# Altium PCB PCB1_corrosao.PcbDoc (part 1 of 2)
Units mil, origin at the board's own origin, x right, y up, seen from the top; angles counter-clockwise.
Board outline 5775 x 3675 mil, 2 copper layers (Top Layer, Bottom Layer); 104 components, 55 nets, 279 pads, 10 vias.
Unrouted connection lines stored in the file: 28.
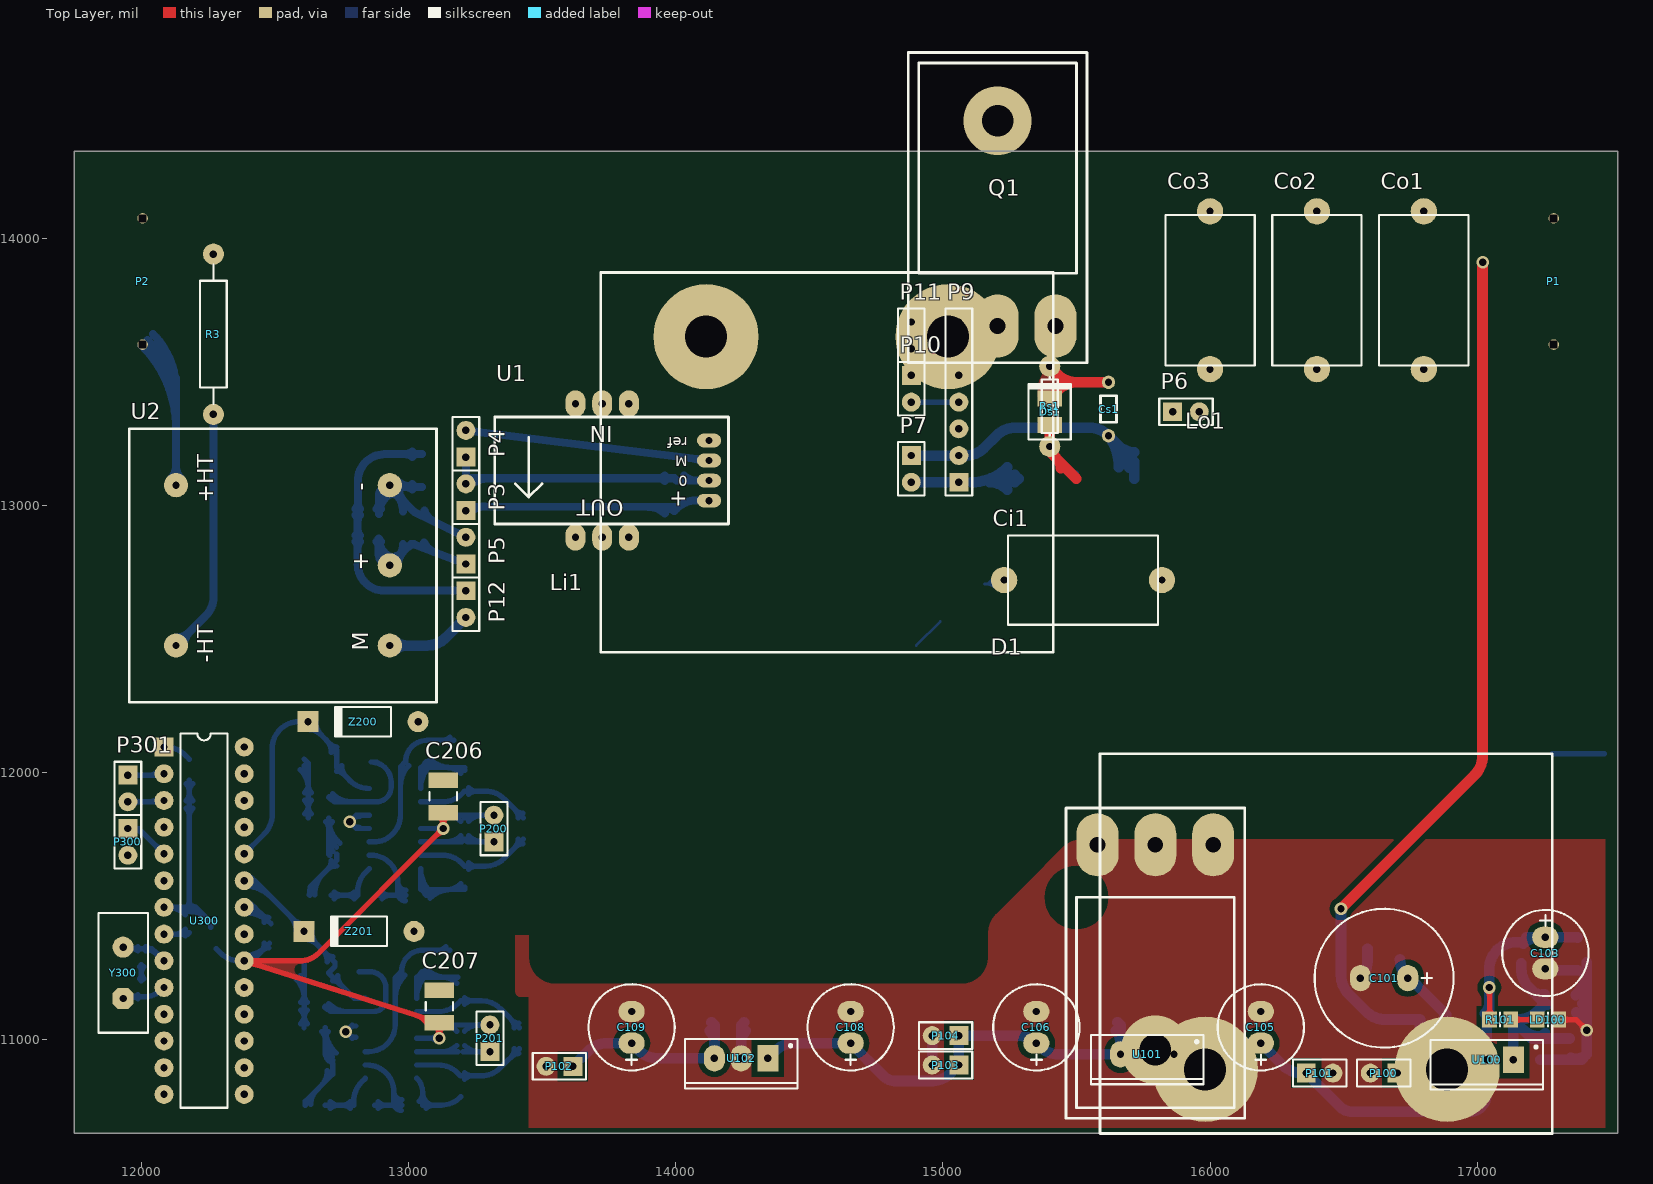
[diagram p0: Top Layer view]
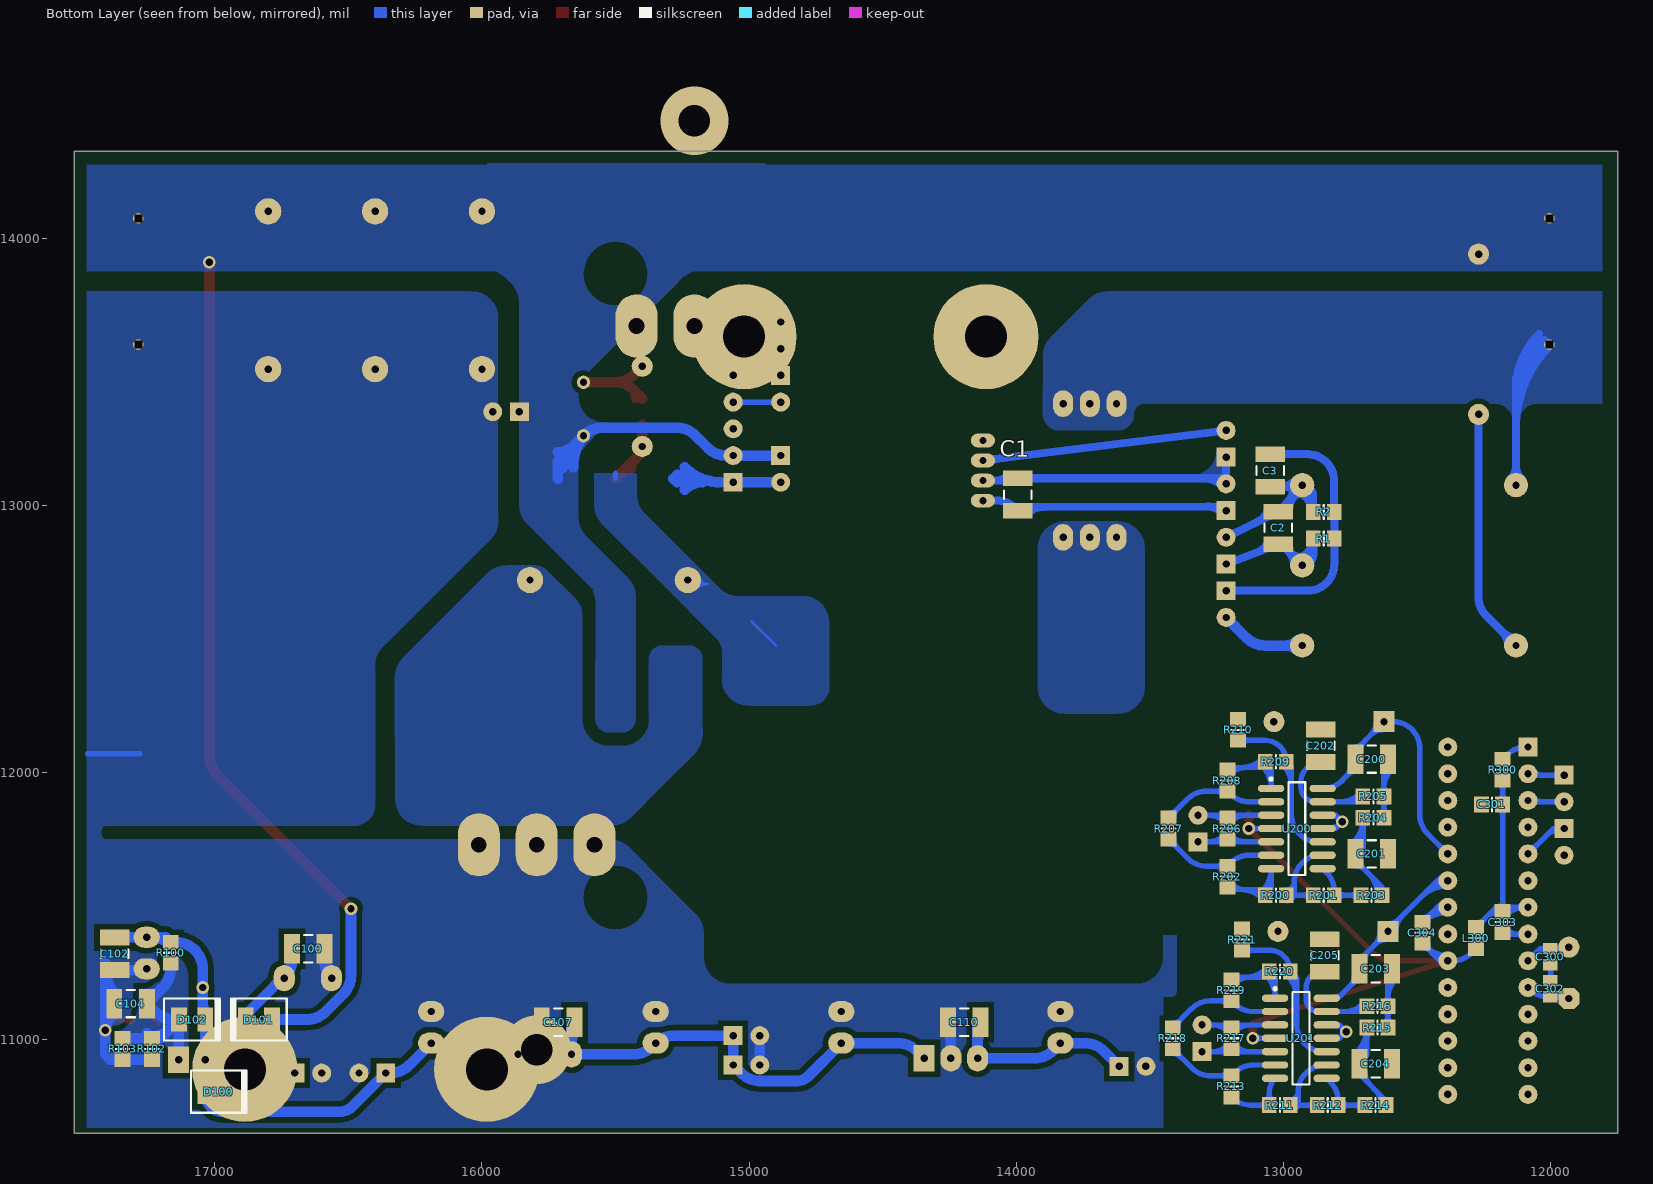
[diagram p1: Bottom Layer view, seen from below]

## Layer stack, top to bottom
Top Solder: solder mask 0.4, Solder Resist, Dk 3.5
Top Layer: signal copper 1.4
Dielectric1: dielectric 12.6, FR-4, Dk 4.8
Bottom Layer: signal copper 1.4
Bottom Solder: solder mask 0.4, Solder Resist, Dk 3.5

## Board outline
11750,14325 17525,14325 17525,10650 11750,10650

## Design rules (kind name [scope] priority, off if disabled: settings)
Clearance [All] p1: gap=20
PolygonConnect [All] p1: connectstyle=Direct reliefconductorwidth=10 reliefentries=4 polygonreliefangle="45 Angle" airgapwidth=10
RoutingVias [All] p1: holewidth=28 width=50 viastyle="Through Hole" minholewidth=28 minwidth=50 maxholewidth=28 maxwidth=50
SolderMaskExpansion [All] p1: expansion=4
Width [All] p1: maxlimit=100 minlimit=10 preferedwidth=20 minimp=50.000000 maximp=50.000000 favimp=50.000000
30 further rules are at their usual default settings.

## Classes and differential pairs
component class cuk: C1 C2 C3 Ci1 Co1 Co2 Co3 Cs1 D1 Ds1 Li1 Lo1 P1 P2 P3 P4 P5 P6 P7 P9 P10 P11 P12 Q1 R1 R2 R3 Rs1 U1 U2
component class Signals: C200 C201 C202 C203 C204 C205 C206 C207 P200 P201 R200 R201 R202 R203 R204 R205 R206 R207 R208 R209 R210 R211 R212 R213 R214 R215 R216 R217 R218 R219 R220 R221 U200 U201 Z200 Z201
component class uController: C300 C301 C302 C303 C304 L300 P300 P301 R300 U300 Y300
component class voltageSupplies: C100 C101 C102 C103 C104 C105 C106 C107 C108 C109 C110 D100 D101 D102 LD100 P100 P101 P102 P103 P104 R100 R101 R102 R103 U100 U101 U102

## Components (designator, comment, footprint, x,y, rotation, side; value= is the part's Value field where it differs from the comment)
C1 "Cer" C1210_M 13995,13040 r90 bottom
C2 "Cer" C1210_M 13020,12915 r270 bottom
C3 "Cer" C1210_M 13050,13130 r90 bottom
C100 "Cap" C1210_M 16650,11340 r0 bottom
C101 "Cap" CAPELTR-RAD6.6-DPP4.5 16562.83,11230 r0 top
C102 "Cap" C1210_M 17375,11321.06 r90 bottom
C103 "Cap" CAPELTR-RAD4.1-DPP3.0 17255,11265 r90 top
C104 "Cap" C1210_M 17315,11135 r180 bottom
C105 "Cap" CAPELTR-RAD4.1-DPP3.0 16190,11105 r270 top
C106 "Cap" CAPELTR-RAD4.1-DPP3.0 15350,11105 r270 top
C107 "Cap" C1210_M 15715,11065 r180 bottom
C108 "Cap" CAPELTR-RAD4.1-DPP3.0 14655,11105 r270 top
C109 "Cap" CAPELTR-RAD4.1-DPP3.0 13835,11105 r270 top
C110 "Cap" C1210_M 14195,11065 r180 bottom
C200 "Cer" C1210_M 12670,12050 r0 bottom
C201 "Cer" C1210_M 12670,11695 r0 bottom
C202 "Cer" C1210_M 12860,12100 r270 bottom
C203 "Cer" C1210_M 12655,11265 r0 bottom
C204 "Cer" C1210_M 12655,10910 r0 bottom
C205 "Cer" C1210_M 12845,11315 r270 bottom
C206 "Cer" C1210_M 13130,11910 r270 top
C207 "Cer" C1210_M 13116,11124 r270 top
C300 "Cap" C0805 12002,11310.47 r90 bottom
C301 "Cap" 6-0805_M 12220,11880 r0 bottom
C302 "Cap" C0805 12002,11190 r270 bottom
C303 "Cap" 6-0805_M 12180,11440 r270 bottom
C304 "Cap" 6-0805_M 12480,11400 r90 bottom
Ci1 "Cap" CAP4U7 15229.45,12720 r0 top
Co1 "Cap" CAP4U7 16800,14100 r270 top
Co2 "Cap" cap4u7 16400,14100 r270 top
Co3 "Cap" cap4u7 16000,14100 r270 top
Cs1 "Cap" 100NF 15620,13260 r90 top
D1 "60APU06" TO-247AC_HORIZONTAL 15795.28,10961.42 r180 top locked
D100 "BYD77" SOD87 16985,10805 r180 bottom
D101 "Diode 1N4002" SOD87 16835,11075 r0 bottom
D102 "1N4002" SOD87 17085,11075 r180 bottom
Ds1 "BYD77" SOD87 15400,13350 r90 top
L300 "Ferrite Bead" 6-0805_M 12280,11380 r90 bottom
LD100 "RED" 6-0805_M 17264.37,11075 r0 top
Li1 "Inductor" ? 13720,12450 r0 top locked
Lo1 "Inductor" ? 17281.1,12070 r180 top
P1 "Battery Connection" "POWER CONNECTION" 17286.1,13837.48 r270 top
P2 "Panel Connection" "POWER CONNECTION" 12005,13837.48 r90 top
P3 "+5V (Current Sensor)" HDR1X2 13215,12980 r90 top
P4 "Current Sensor Out" HDR1X2 13215,13180 r90 top
P5 "+24V or +-15V (Voltage Sensor)" HDR1X2 13215,12780 r90 top
P6 "Battery Connection" HDR1X2 15860,13350 r0 top
P7 "Mosfet Gate" HDR1X2 14882,13186 r270 top
P9 "Driver (INEP)" HDR1X7 15060,13086 r90 top
P10 "+12V (Driver)" HDR1X2 14882,13486 r270 top
P11 "PWM from uC (5v)" HDR1X2 14882,13586 r90 top
P12 "Voltage Sensor Out" HDR1X2 13215,12680 r270 top
P100 "Battery Connection" HDR1X2 16700,10875 r180 top
P101 "+24V (Voltage Sensor)" HDR1X2 16360,10875 r0 top
P102 "+5V (Current Sensor)" HDR1X2 13615,10900 r180 top
P103 "12V to Driver" HDR1X2 15060,10905 r180 top
P104 "12V to Fan" HDR1X2 15060,11015 r180 top
P200 "Current Sensor In" HDR1X2 13320,11740 r90 top
P201 "Voltage Sensor In" HDR1X2 13305,10955 r90 top
P300 "PWM from uC (5v)" HDR1X2 11950,11790 r270 top
P301 "Serial Port" HDR1X2 11950,11990 r270 top
Q1 "IRFP260" TO-247AC_HORIZONTAL 15204.72,14438.58 r0 top locked
R1 "1%" 6-0805_M 12849.37,12875 r180 bottom
R2 "1%" 6-0805_M 12849.37,12975 r0 bottom
R3 "1%" AXIAL-0.6 12270,13640 r90 top
R100 "Res1" 6-0805_M 17165,11325 r270 bottom
R101 "Res1" 6-0805_M 17085.63,11075 r180 top
R102 "Res1" 6-0805_M 17235,10965 r90 bottom
R103 "Res1" 6-0805_M 17345,10965 r90 bottom
R200 "1%" 6-0805_M 13028.74,11540 r0 bottom
R201 "1%" 6-0805_M 12849.37,11540 r0 bottom
R202 "1%" 6-0805_M 13210,11610 r270 bottom
R203 "1%" 6-0805_M 12670.63,11540 r0 bottom
R204 "1%" 6-0805_M 12663.62,11830 r0 bottom
R205 "1%" 6-0805_M 12663.62,11910 r180 bottom
R206 "1%" 6-0805_M 13210,11790 r270 bottom
R207 "1%" 6-0805_M 13430,11790 r270 bottom
R208 "1%" 6-0805_M 13210,11969.37 r270 bottom
R209 "1%" 6-0805_M 13028.74,12040 r0 bottom
R210 "1%" 6-0805_M 13170,12159.37 r270 bottom
R211 "1%" 6-0805_M 13013.74,10755 r0 bottom
R212 "1%" 6-0805_M 12834.37,10755 r0 bottom
R213 "1%" 6-0805_M 13195,10825 r270 bottom
R214 "1%" 6-0805_M 12655.63,10755 r0 bottom
R215 "1%" 6-0805_M 12648.62,11045 r0 bottom
R216 "1%" 6-0805_M 12648.62,11125 r180 bottom
R217 "1%" 6-0805_M 13195,11005 r270 bottom
R218 "1%" 6-0805_M 13415,11005 r270 bottom
R219 "1%" 6-0805_M 13195,11184.37 r270 bottom
R220 "1%" 6-0805_M 13013.74,11255 r0 bottom
R221 "1%" 6-0805_M 13155,11374.37 r270 bottom
R300 "Res1" 6-0805_M 12180,12010 r270 bottom
Rs1 "1%" AXIAL-0.3 15400,13370 r270 top
U1 "LTSP 25-NP" "LTSP 25-NP" 13825,13380 r180 top
U2 "LV20-P" LV20-P 12130,12475 r90 top locked
U100 "TL783" TO-220AB 17035,10925 r180 top
U101 "LM7812" TO-220AB 15765,10945 r180 top
U102 "LM7805" TO-220AB 14245,10930 r180 top
U200 "LP324M" M14A_M 12950,11790 r180 bottom
U201 "LP324M" M14A_M 12935,11005 r180 bottom
U300 "ATmega328p" 28P3 12235,11445 r270 top
Y300 "16MHz" HC-49U 11932,11250 r90 top
Z200 "5V1" DO-41 12830,12190 r180 top
Z201 "5V1" DO-41 12815,11405 r180 top

## Footprints (in the part's own frame and the unit in brackets; to place one, negate y for a bottom-side part, rotate by r counter-clockwise, add the part's x,y. Pads: shape width x height; smd on the part's side, far side on the other; paste and mask are expansions set on the pad)
6-0805_M [mm] "Chip Resistor, Body 2.0x1.2mm, IPC Low Density"
  rect 1.4x1.5 smd: 1(-1,0) 2(1,0)
  silkscreen extent 0,-0.65 0,0.65, body extent -1.07,-0.7 1.07,0.7, height 0.7
28P3 [mm] "DIP; 28 Leads; Row Spacing 7.62 mm; Pitch 2.54 mm"
  rect 1.8x1.8 hole 0.7: 1(-16.51,-3.81)
  round 1.8 hole 0.7: 2(-13.97,-3.81) 3(-11.43,-3.81) 4(-8.89,-3.81) 5(-6.35,-3.81) 6(-3.81,-3.81) 7(-1.27,-3.81) 8(1.27,-3.81) 9(3.81,-3.81) 10(6.35,-3.81) 11(8.89,-3.81) 12(11.43,-3.81) 13(13.97,-3.81) 14(16.51,-3.81) 15(16.51,3.81) 16(13.97,3.81) 17(11.43,3.81) 18(8.89,3.81) 19(6.35,3.81) 20(3.81,3.81) 21(1.27,3.81) 22(-1.27,3.81) 23(-3.81,3.81) 24(-6.35,3.81) 25(-8.89,3.81) 26(-11.43,3.81) 27(-13.97,3.81) 28(-16.51,3.81)
  silkscreen extent -17.78,-2.23 17.78,2.23
100NF [mm]
  round 1.27 hole 0.7: 1(0,0) 2(5.08,0)
  silkscreen extent 1.27,-0.76 3.81,0.76
AXIAL-0.3 [mm] "Axial Device, Thru-Hole; 2 Leads; 0.3 in Pin Spacing"
  round 2 hole 0.7: 1(-3.81,0) 2(3.81,0)
  silkscreen extent -2.77,-0.76 2.77,0.76
AXIAL-0.6 [mm] "Axial Device, Thru-Hole; 2 Leads; 0.6 in Pin Spacing"
  round 2 hole 0.7: 1(-7.62,0) 2(7.62,0)
  silkscreen extent -6.6,-1.27 6.6,1.27
C0805 [mm] "Chip Capacitor, Body 2.0x1.3mm, IPC High Density"
  rect 1.1x1.4 smd: 1(-0.75,0) 2(0.75,0)
  body extent -1.1,-0.72 1.1,0.72, height 1.4
C1210_M [mm] "Chip Capacitor, Body 3.2x2.5mm, IPC Low Density"
  rect 1.5x2.8 smd: 1(-1.55,0) 2(1.55,0)
  silkscreen extent -0.4,-1.3 0.4,1.3, body extent -1.7,-1.35 1.7,1.35, height 1.5
CAP4U7 [mm]
  round 2.5 hole 0.7: 1(0,0) 2(15,0)
  silkscreen extent 0.35,-4.25 14.64,4.25
cap4u7 [mm]
  round 2.5 hole 0.7: 1(0,0) 2(15,0)
  silkscreen extent 0.35,-4.25 14.64,4.25
CAPELTR-RAD4.1-DPP3.0 [mm] "Capacitor Eletrolitico Radial 4.1mm com 3.0mm entre pinos"
  oval 2x2.5 hole 0.7: 1(0,0) 2(3,0)
  silkscreen extent -2.6,-4.1 5.6,4.1
CAPELTR-RAD6.6-DPP4.5 [mm] "Capacitor Eletrolitico Radial 6.6mm com 4.5mm entre pinos"
  oval 2x2.5 hole 0.7: 1(0,0) 2(4.5,0)
  silkscreen extent -4.35,-6.6 8.85,6.6
DO-41 [mm] "Diode, Axial; Body 5.2 x 2.7 mm (LxDia. max), Lead Dia. 0.86 mm (max)"
  round 2 hole 0.7: 1(-5.23,0)
  rect 2x2 hole 0.7: 2(5.23,0)
  silkscreen extent -2.65,-1.41 2.75,1.4
HC-49U [mm] "Quartz Crystal, Thru-Hole; 2 Leads; Body 11.35 x 4.65 x 13.46 mm (LxWxH max)"
  oct 2x2 hole 0.7: 1(-2.44,0)
  round 2 hole 0.7: 2(2.44,0)
  silkscreen extent -5.7,-2.35 5.7,2.35
HDR1X2 [mm] "Connector; Header; 2 Position"
  rect 1.8x1.8 hole 0.7: 1(0,0)
  round 1.8 hole 0.7: 2(2.54,0)
  silkscreen extent -1.27,-1.27 3.81,1.27
HDR1X7 [mm] "Connector; Header; 7 Position"
  rect 1.8x1.8 hole 0.7: 1(0,0)
  round 1.8 hole 0.7: 2(2.54,0) 3(5.08,0) 4(7.62,0) 5(10.16,0) 6(12.7,0) 7(15.24,0)
  silkscreen extent -1.27,-1.27 16.51,1.27
"LTSP 25-NP" [mm] "Current Transducer (25 A)"
  oval 1.9x2.54 hole 0.7 unplated: 1(0,0) 2(2.54,0) 3(5.08,0) 4(5.08,12.7) 5(2.54,12.7) 6(0,12.7)
  oval 2.3x1.3 hole 0.7 unplated: 7(-7.62,9.21) 8(-7.62,7.305) 9(-7.62,5.4) 10(-7.62,3.495)
  silkscreen extent -9.46,1.27 12.74,11.43
LV20-P [mm] "Voltage Transducer LV 20-P"
  round 2.3 hole 0.7 unplated: 1(0,-20.32) 2(7.62,-20.32) 3(15.24,-20.32) 4(0,0) 5(15.24,0)
  silkscreen extent -5.38,-24.76 20.62,4.44
M14A_M [mm] "SOIC, 14-Leads, Body 8.6x3.9mm, Pitch 1.27mm, IPC Low Density"
  oval 2.5x0.7 smd: 1(-2.45,3.81) 2(-2.45,2.54) 3(-2.45,1.27) 4(-2.45,0) 5(-2.45,-1.27) 6(-2.45,-2.54) 7(-2.45,-3.81) 8(2.45,-3.81) 9(2.45,-2.54) 10(2.45,-1.27) 11(2.45,0) 12(2.45,1.27) 13(2.45,2.54) 14(2.45,3.81)
  silkscreen extent -2.58,-4.4 0.8,4.83, body extent -2,-4.38 2,4.38, height 1.75
"POWER CONNECTION" [mm]
  round 1 hole 0.7 square: 1(-6,0) 2(6,0)
SOD87 [mm]
  rect 1.5x2.3 smd: A(-1.253,0) K(1.253,0)
  silkscreen extent -2.65,-2.01 2.65,2.01
TO-220AB [mm] "TO, Thru-Hole, Vertical, Heatsink Mounted; 3 In-Line Leads; Pitch 2.54 mm"
  rect 2x2.5 hole 0.7: 1(-2.54,0)
  oval 2x2.5 hole 0.7: 2(0,0) 3(2.54,0)
  silkscreen extent -5.35,-1.85 5.35,2.85, body extent -5.4,-1.9 5.4,2.9, height 19.3
TO-247AC_HORIZONTAL [mm]
  oval 4x6 hole 1.5: 1(-5.5,-19.5) 2(0,-19.5) 3(5.5,-19.5)
  silkscreen extent -8.5,-23 8.5,6.5, body extent -7.75,-19.8 7.75,5.6, height 5
? [mm]
  round 10 hole 4: 1(10,30) 2(33,30)
  silkscreen extent 0,0 43,36.1

## Part data
C1 C2 C3 C200 C201 C202 C203 C204 C205 C206 C207: library part Cap, "Capacitor"
C100 C101 C102 C103 C104 C105 C106 C107 C108 C109 C110 C301 C303 C304 Ci1 Co1 Co2 Co3 Cs1: "Capacitor"
C300 C302: library part "Cap Semi", "Capacitor (Semiconductor SIM Model)"
D100 D102 Ds1: library part "Diode 1N4002", "1 Amp General Purpose Rectifier"
D101: "1 Amp General Purpose Rectifier"
L300: library part Inductor, "Inductor"
LD100: library part LED, "Diodo Emissor de Luz"
P1 P2 P3 P4 P5 P6 P7 P10 P11 P12 P100 P101 P102 P103 P104 P200 P201 P300 P301: library part "Header 2", "Header, 2-Pin"
P9: library part "Header 7", "Header, 7-Pin"
Q1: "HEXFET Power MOSFET"
R1 R2 R3 R200 R201 R202 R203 R204 R205 R206 R207 R208 R209 R210 R211 R212 R213 R214 R215 R216 R217 R218 R219 R220 R221 Rs1: library part Res1, "Resistor"
R100 R101 R102 R103 R300: "Resistor"
U1: "Current Transducer LTSP (25 A)"
U2: "Voltage Transducer (500 V)"
U100: library part L7805ACV, "Precision 1A Regulator"
U101 U102: library part µA7805CKC, "Positive-Voltage Regulator"
U200 U201: "Micropower Quad Operational Amplifier"
U300: library part ATmega8-16PI, "8-Bit AVR Microcontroller with 8K Bytes of In-System Programmable Flash Memory"
Y300: library part ECS-10-13-1, "Crystal Oscillator"
Z200 Z201: library part "D Zener", "Zener Diode"

## Via types
v1: diameter 47.24, hole 27.56, Top Layer to Bottom Layer, 8 vias
v2: diameter 255.91, hole 118.11, Top Layer to Bottom Layer, 2 vias

## Nets (pads, with @x,y where several pads share a name; then routed paths per layer and width w, separated by ;. In a path a pad name is that pad's centre, name@x,y a point inside that pad or via, vN(x,y) a via of type N, cw(c..) or ccw(c..) an arc to the next point about the centre after c; other vN are vias at no path point)
+5V: C109.2 C110.2 C301.1 C303.1 L300.2 P102.1 R300.2 U102.3 U300.7 | length 2218.1
  Bottom Layer w20: U300.7@12085,11495 12204.37,11495 L300.2@12255.59,11443.78 ; U300.7@12097.91,11495 cw(c12097.91,11399.25) C303.1@12165.62,11466.95 ; U300.7@12098.81,11481.19 cw(c12132.14,11447.86) 12132.14,11495 cw(c12132.14,11542.14) U300.7@12098.81,11508.81 ; 12146.19,11495 cw(c12146.19,11447.53) C303.1@12179.76,11481.1 ; C303.1@12167.58,11491.79 ccw(c12137.61,11521.76) 12180,11521.76 ccw(c12222.39,11521.76) C303.1@12192.42,11491.79 ; R300.2@12167.58,11958.21 cw(c12137.61,11928.24) 12180,11928.24 cw(c12222.39,11928.24) R300.2@12192.42,11958.21 ; C301.1@12168.21,11865.62 cw(c12139.76,11837.16) 12180,11837.16 ; C301.1@12168.21,11894.38 ccw(c12139.76,11922.84) 12180,11922.84 ; 12180,11834.12 cw(c12224.54,11834.12) C301.1@12193.05,11865.62 ; 12180,11925.88 ccw(c12224.54,11925.88) C301.1@12193.05,11894.38 ; R300.2@12180,11970.63 12180,11560.63 C303.1@12180,11479.37 ; C303.1@12181.48,11501.81 cw(c12182.28,11464.94) C303.1@12208.36,11491.01 ; C303.1@12181.92,11481.81 cw(c12183.69,11400.1) 12241.48,11457.89 ; 12246.66,11452.71 cw(c12213.33,11419.37) L300.2@12260.47,11419.37 ; 12251.42,11447.95 ccw(c12278.03,11474.57) L300.2@12278.03,11436.93 ; C303.1@12180,11479.37 cw(c12180,11382.8) 12248.28,11451.09 ccw(c12180,11382.8) C303.1@12180,11479.37
  Bottom Layer w40: P102.1@13615,10900 13672.6,10957.6 cw(c13743.31,10886.89) 13743.31,10986.89 C109.2@13835,10986.89 13862.6,10959.29 ccw(c13933.31,11030) 13933.31,10930 U102.3@14145,10930 14145,11053.98 C110.2@14133.98,11065 ; C110.2@14127.24,11032.67 cw(c14084.36,10989.79) 14145,10989.79
+5V_ADC: C206.2 C207.2 C304.1 L300.1 U200.4 U201.4 U300.20 | length 3178.7
  Top Layer w20: U300.20@12393.98,11277.66 cw(c12415.67,11235.8) 12429.93,11280.74 cw(c12444.2,11325.67) U300.20@12402.34,11303.98 ; U300.20@12398.81,11281.19 cw(c12432.14,11247.86) 12432.14,11295 cw(c12432.14,11342.14) U300.20@12398.81,11308.81 ; 13030,11090.27 cw(c13007.74,11020.14) C207.2@13073.07,11053.99 ; C207.2@13101.96,11049.41 cw(c13068.05,11016.65) 13115.19,11015.84 cw(c13162.32,11015.03) C207.2@13129.57,11048.93 ; v1@13105.54,11014.8 ccw(c13082.69,11038.45) 13115.57,11037.88 ccw(c13148.45,11037.31) v1@13124.8,11014.46 ; v1(13115,11005) C207.2@13116,11062.98 13029.6,11090.4 U300.20@12385,11295 12593.58,11295 ccw(c12593.58,11395) 12664.29,11324.29 v1(13130,11790) C206.2@13130,11848.98 ; C206.2@13116.19,11835.17 cw(c13082.86,11801.83) 13130,11801.83 cw(c13177.14,11801.83) C206.2@13143.81,11835.17 ; v1@13116.38,11790 cw(c13083.49,11790) 13106.75,11766.75 cw(c13130,11743.49) v1@13130,11776.38 ; v1@13120.37,11799.63 ccw(c13097.11,11822.89) 13130,11822.89 ccw(c13162.89,11822.89) v1@13139.63,11799.63
  Bottom Layer w20: L300.1@12280,11340.63 12296.34,11324.29 ccw(c12367.05,11395) 12367.05,11295 U300.20@12385,11295 ; U300.20@12385,11294.53 ccw(c12385,11364.29) 12434.33,11314.96 ; U300.20@12385,11297.44 U300.20@12385,11295 ; U300.20@12385,11314.53 ccw(c12385,11432.58) C304.1@12468.47,11349.1 ; 12446.66,11327.29 ccw(c12413.33,11360.63) C304.1@12460.47,11360.63 ; 12451.42,11332.05 cw(c12478.03,11305.43) C304.1@12478.03,11343.07 ; C304.1@12480,11360.63 12414.37,11295 U300.20@12385,11295 ; U201.4@13031.46,11005 v1(13115,11005) ; U200.4@13046.46,11790 v1(13130,11790) ; v1@13105.37,10995.37 ccw(c13082.11,10972.11) 13082.11,11005 ccw(c13082.11,11037.89) v1@13105.37,11014.63 ; v1@13120.37,11780.37 ccw(c13097.11,11757.11) 13097.11,11790 ccw(c13097.11,11822.89) v1@13120.37,11799.63 ; U300.20@12385,11295 ccw(c12385,11365.91) 12435.14,11315.77 cw(c12385,11365.91) U300.20@12385,11295
+12V: C106.2 C107.2 C108.2 P103.1 P104.1 U101.3 U102.1 | length 1793.9
  Bottom Layer w40: U102.1@14345,10930 14372.6,10957.6 cw(c14443.31,10886.89) 14443.31,10986.89 C108.2@14655,10986.89 14779.74,10862.15 ccw(c14820,10902.41) 14820,10845.47 14962.99,10845.47 ccw(c14962.99,10845.77) 14963.2,10845.56 ccw(c14959.05,10945.47) 14989.36,10850.18 ccw(c14959.05,10945.47) 15029.76,10874.76 P103.1@15060,10905 P104.1@15060,11015 15282.14,11015 ; C107.2@15647.24,11032.67 cw(c15604.36,10989.79) U101.3@15665,10989.79 ; C107.2@15653.98,11065 15665,11053.98 U101.3@15665,10945 15433.31,10945 cw(c15433.31,11045) 15362.6,10974.29 C106.2@15350,10986.89 ; 15282.14,11015 cw(c15282.14,10919.03) C106.2@15350,10986.89 ; 15282.14,11015 cw(c15282.14,10919.03) C106.2@15350,10986.89
+24V: C102.2 C103.2 C105.2 D100.A D102.K P101.1 R100.1 R101.2 U100.2 U101.1 | length 2506.3
  Top Layer w20: R101.2@17033.84,11089.38 ccw(c17003.87,11119.36) 17046.26,11119.36 ccw(c17088.65,11119.36) R101.2@17058.68,11089.38 ; v1@17035.37,11185.37 cw(c17009.07,11159.07) 17046.26,11159.07 ; v1(17045,11195) 17046.26,11193.74 R101.2@17046.26,11075 ; 17046.26,11165.16 cw(c17074.85,11165.16) v1@17054.63,11185.37
  Bottom Layer w40: U101.1@15865,10945 15877.6,10957.6 cw(c15948.31,10886.89) 15948.31,10986.89 C105.2@16190,10986.89 16272.6,10904.29 ccw(c16343.31,10975) 16343.31,10875 P101.1@16360,10875 16484.26,10750.74 ccw(c16535,10801.49) 16535,10729.72 16970,10729.72 ccw(c16970,10794.06) 17034.34,10794.06 D100.A@17034.34,10805 ; D102.K@17028.92,11097.49 ccw(c16990.11,11136.29) 17045,11136.29 ; D100.A@17035.66,10806.32 D102.K@17035.66,11075 17045,11084.34 v1(17045,11195) 17045,11264.37 cw(c17145,11264.37) 17067.21,11327.21 cw(c17145,11264.37) 17082.16,11342.16 cw(c17145,11264.37) 17145,11364.37 R100.1@17165,11364.37 ; R100.1@17172.31,11359.03 cw(c17230.46,11300.88) C103.2@17230.46,11383.11 ; R100.1@17183.74,11383.11 C103.2@17255,11383.11 17373.98,11383.11 C102.2@17375,11382.09
+VPANEL: P2.1 U1.1 U1.2 U1.3 U2.5 | length 1377.6
  Bottom Layer w30: P2.1@12001.69,13597.95 cw(c11691.91,13288.17) 12130,13288.17 ; 12022.9,13619.16 cw(c11764.34,13360.6) 12130,13360.6 ; 12044.11,13640.37 cw(c11836.77,13433.03) 12130,13433.03 ; U2.5@12108.59,13096.41 ccw(c12056.91,13148.09) 12130,13148.09 ccw(c12203.09,13148.09) U2.5@12151.41,13096.41 ; U2.5@12130,13075 12130,13476.26
-VBAT: C1.2 C100.1 C101.1 C102.1 C103.1 C104.1 C105.1 C106.1 C107.1 C108.1 C109.1 C110.1 C201.1 C202.1 C204.1 C205.1 C206.1 C207.1 C300.1 C301.2 C302.1 C303.2 C304.2 Co1.2 Co2.2 Co3.2 LD100.2 Lo1.1 P1.2 P3.2 P4.1 P6.2 P9.4 P9.7 P10.2 P11.2 P100.2 P101.2 P102.2 P103.2 P104.2 P300.2 R102.1 R103.1 R210.1 R221.1 U1.8 U101.2 U102.2 U200.11 U200.12 U201.11 U201.12 U300.8 U300.22 Z200.1 Z201.1 | length 5446
  Top Layer w20: LD100.2@17303.74,11075 17370,11075 v1(17410,11035) ; LD100.2@17316.16,11062.58 cw(c17346.13,11032.61) 17346.13,11075 cw(c17346.13,11117.39) LD100.2@17316.16,11087.42 ; v1@17396.38,11035 ccw(c17363.49,11035) 17386.75,11058.25 ccw(c17410,11081.51) v1@17410,11048.62
  Bottom Layer w20: C302.1@11993.76,11227.77 ccw(c11978.69,11242.83) 12000,11242.83 ; C300.1@11993.76,11272.7 cw(c11978.69,11257.64) 12000,11257.64 ; C302.1@12000,11219.53 C300.1@12000,11280.94 ; 12000,11247.98 cw(c12034.96,11247.98) C300.1@12010.24,11272.7 ; 12000,11252.49 ccw(c12034.96,11252.49) C302.1@12010.24,11227.77 ; U300.8@12085,11395 12174.37,11395 C303.2@12180,11400.63 ; U300.8@12098.81,11381.19 cw(c12132.14,11347.86) 12132.14,11395 cw(c12132.14,11442.14) U300.8@12098.81,11408.81 ; 12122.05,11395 ccw(c12122.05,11456.61) C303.2@12165.62,11413.05 ; 12149.23,11395 cw(c12149.23,11371.83) C303.2@12165.62,11388.21 ; U300.22@12384.72,11495.38 cw(c12404.05,11468.56) 12427.43,11491.94 ; U300.22@12385,11475.47 cw(c12385,11333.28) C304.2@12485.54,11433.83 ; U300.22@12385,11495.47 cw(c12385,11401.57) 12451.4,11467.97 ccw(c12478.03,11494.57) C304.2@12478.03,11456.93 ; U300.22@12385,11515.47 cw(c12385,11469.85) U300.22@12417.26,11502.11 ; U300.22@12396.42,11479.16 cw(c12417.98,11449.24) 12444.05,11475.32 ; U300.22@12400.55,11483.18 cw(c12424.37,11465.08) 12424.37,11495 ; U300.22@12400.55,11506.82 ccw(c12424.37,11524.92) 12424.37,11495 ; 12446.66,11472.71 cw(c12413.33,11439.37) C304.2@12460.47,11439.37 ; C304.2@12480,11439.37 12452.21,11467.16 ; v1@12774.28,11020.72 ccw(c12803.11,11049.55) U201.11@12803.11,11008.78 ; v1@12774.28,11039.28 cw(c12803.11,11010.45) U201.12@12803.11,11051.22 ; v1@12789.28,11805.72 ccw(c12818.11,11834.55) U200.11@12818.11,11793.78 ; v1@12789.28,11824.28 cw(c12818.11,11795.45) U200.12@12818.11,11836.22 ; U201.11@12790,11005 v1(12765,11030) U201.12@12790,11055 ; U200.11@12853.54,11790 12805,11790 v1(12780,11815) 12805,11840 U200.12@12853.54,11840 ; P10.2@14882,13386 P9.4@15060,13386 ; P11.2@14882,13686 P9.7@15060,13686 ; P10.2@14895.81,13372.19 cw(c14929.14,13338.86) 14929.14,13386 cw(c14929.14,13433.14) P10.2@14895.81,13399.81 ; P11.2@14895.81,13672.19 cw(c14929.14,13638.86) 14929.14,13686 cw(c14929.14,13733.14) P11.2@14895.81,13699.81 ; P9.4@15046.19,13372.19 ccw(c15012.86,13338.86) 15012.86,13386 ccw(c15012.86,13433.14) P9.4@15046.19,13399.81 ; P9.7@15046.19,13672.19 ccw(c15012.86,13638.86) 15012.86,13686 ccw(c15012.86,13733.14) P9.7@15046.19,13699.81 ; 17281.1,12070 17475,12070 ; 12424.37,11495 U300.22@12385,11495 cw(c12385,11399.95) 12452.21,11467.16 ; 12424.37,11495 12452.21,11467.16
  Bottom Layer w30: P3.2@13204.73,13090.27 ccw(c13179.93,13115.07) 13215,13115.07 ccw(c13250.07,13115.07) P3.2@13225.27,13090.27 ; P4.1@13204.73,13169.73 cw(c13179.93,13144.93) 13215,13144.93 cw(c13250.07,13144.93) P4.1@13225.27,13169.73 ; P4.1@13215,13180 P3.2@13215,13080 13236.02,13101.02 C1.2@13995,13101.02 14003.62,13092.4 U1.8@14125,13092.4 ; P3.2@13225.27,13069.73 cw(c13300.83,12994.17) 13300.83,13101.02 ; C1.2@13959.14,13090.75 ccw(c13934.34,13065.95) 13934.34,13101.02 ccw(c13934.34,13136.1) C1.2@13959.14,13111.3 ; C1.2@14030.86,13111.3 ccw(c14076.48,13156.91) 14076.48,13092.4
  Bottom Layer w40: U102.2@14245,10930 14245,11053.98 C110.1@14256.02,11065 ; 14245,10989.79 cw(c14305.64,10989.79) C110.1@14262.76,11032.67 ; P103.2@14960,10905 P104.2@14960,11015 ; U101.2@15765,10945 15765,11053.98 C107.1@15776.02,11065 ; U101.2@15765,10989.79 cw(c15825.64,10989.79) C107.1@15782.76,11032.67 ; C101.1@16562.83,11230 ccw(c16499.72,11293.11) 16588.98,11293.11 C100.1@16588.98,11340 ; R102.1@17235.63,10925 17345.63,10925 R103.1@17345,10925.63 17390.63,10925.63 17410,10945 ; C103.1@17255,11265 17259.96,11260.04 C102.1@17375,11260.04 ; C103.1@17263.13,11273.13 ccw(c17294.73,11304.73) C103.1@17294.73,11260.04 ; R103.1@17349.78,10932.65 ccw(c17370.53,10984.47) 17410,10945 ; C104.1@17369.29,11167.33 ccw(c17271,11265.62) C102.1@17410,11265.62 ; C104.1@17370.7,11101.51 cw(c17320.88,11027.61) v1@17410,11027.61 ; C104.1@17393.06,11134.68 cw(c17371.58,11102.82) 17410,11102.82 ; C102.1@17393.85,11253.3 cw(c17354.87,11214.32) 17410,11214.32 ; C104.1@17397.57,11139.04 ccw(c17367.56,11169.05) 17410,11169.05 ; 17410,11290.01 v1(17410,11035) 17410,10945
-VPANEL: Co1.1 Co2.1 Co3.1 Cs1.1 D1.2 D101.A P1.1 P2.2 P6.1 P7.1 P9.2 P100.1 Q1.3 R3.2 | length 4761.3
  Top Layer w40: v1(16490,11490) 16990.71,11990.71 ccw(c16920,12061.42) 17011.83,12021.83 ccw(c16920,12061.42) 17020,12061.42 v1(17020,13910)
  Bottom Layer w39.37: P7.1@14882,13186 P9.2@15060,13186 15084.99,13186 ccw(c15084.99,13285.01) 15155,13215 15200.71,13260.71 cw(c15271.42,13190) 15271.42,13290 15548.58,13290 cw(c15548.58,13190) 15619.29,13260.71 Cs1.1@15620,13260 15716.54,13163.46 15716.54,13100 ; Cs1.1@15607.96,13272.04 cw(c15487.61,13151.69) 15657.57,13142.54 ; 15656.85,13223.15 ccw(c15716.54,13282.83) 15716.54,13198.43 ; 15670.37,13209.63 cw(c15606.05,13145.31) 15696.88,13140.43
  Bottom Layer w40: v1(16490,11490) 16490,11241.42 ccw(c16590,11241.42) 16519.29,11170.71 16585.71,11104.29 ccw(c16656.42,11175) 16656.42,11075 D101.A@16785.66,11075 16785.66,11002.08 cw(c16685.66,11002.08) 16756.37,10931.37 P100.1@16700,10875
DRAIN: Ci1.1 Ds1.A Li1.2 Q1.2 Rs1.2 | length 692
  Top Layer w20: Rs1.2@15400,13200 Rs1.2@15400,13220
  Top Layer w39.37: Rs1.2@15400,13200 15500,13100 ; Rs1.2@15400,13220 Ds1.A@15400,13300.66 ; Rs1.2@15407.87,13220 ccw(c15475.17,13220) 15427.58,13172.42 ; 15427.03,13172.97 cw(c15393.42,13139.37) 15440.94,13139.37
  Bottom Layer w10: 14900,12475 14990.55,12565.55 ; 15158.92,12705 cw(c15158.92,12649.47) Ci1.1@15198.19,12688.74 ; 15168.49,12705 ccw(c15168.49,12733.15) Ci1.1@15196,12727.21 ; 15180.88,12705 ccw(c15180.88,12730.47) Ci1.1@15205.78,12725.1 ; Ci1.1@15186.23,12729.32 cw(c15156.1,12735.82) 15156.1,12705 Ci1.1@15209.45,12705
  Bottom Layer w20: 15500,13100 15500,13120
GATE: P7.2 P9.1 Q1.1 | length 1317.7
  Bottom Layer w20: P9.1@15060,13086 15269.46,13086 ; P9.1@15073.81,13072.19 cw(c15107.14,13038.86) 15107.14,13086 cw(c15107.14,13133.14) P9.1@15073.81,13099.81 ; P9.1@15083.71,13086 ccw(c15083.71,13299.75) 15234.86,13148.61 ; 15132,13086 ccw(c15132,13251.47) 15249,13134.46 ; 15151.31,13086 cw(c15151.31,12967.85) 15234.86,13051.39 ; 15180.28,13086 ccw(c15180.28,13203.18) 15263.14,13120.32 ; 15199.59,13086 cw(c15199.59,13016.13) 15249,13065.54
  Bottom Layer w39.37: P7.2@14882,13086 P9.1@15060,13086 ; 15107.09,13086 ccw(c15107.09,13276.37) 15241.71,13141.76 ; 15174.69,13086 cw(c15174.69,12991.23) 15241.71,13058.24 ; 15202.14,13086 ccw(c15202.14,13181.32) 15269.55,13113.92 ; 15269.46,13086 15283.46,13100
NetC2_1: C2.1 C3.1 P5.2 R2.2 U2.3 | length 1678.9
  Bottom Layer w30: U2.3@12930,13044.72 cw(c12930,12993.3) 12966.36,13029.66 ; U2.3@12940.63,13064.37 U2.3@12936.02,13068.98 ; U2.3@12951.41,13053.59 cw(c12988.55,13016.45) 12988.55,13068.98 ; U2.3@12951.41,13096.41 ccw(c13017.63,13162.63) C3.1@13017.63,13068.98 ; U2.3@12951.51,13044.51 cw(c12883.03,12976.02) C2.1@12979.88,12976.02 ; U2.3@12960.28,13075 ccw(c13055.04,13075) 12988.03,13007.99 ; C3.1@13014.14,13058.7 ccw(c12989.34,13033.9) 12989.34,13068.98 ccw(c12989.34,13104.05) C3.1@13014.14,13079.25 ; C3.1@13050,13068.98 U2.3@12936.02,13068.98 ; C2.1@13059.34,12980.7 ccw(c13129.09,13004.42) 13096.55,12938.33 ; P5.2@13201.25,12875.32 ccw(c13168.04,12864.03) 13183.54,12895.49 ccw(c13199.03,12926.96) P5.2@13210.32,12893.75 ; P5.2@13230,12885 13209.99,12885 cw(c13140.07,12813.5) 13210.79,12884.21 P5.2@13215,12880 13147.53,12913.23 C2.1@13020,12976.02 12930,13066.02 U2.3@12930,13075 ; 12889.37,13034.37 cw(c12930,13034.37) U2.3@12930,13075 ; 12889.37,13034.37 12889.37,12975 12889.37,13034.37 ; 12889.37,13034.37 U2.3@12930,13075 ; U2.3@12930,13075 U2.3@12936.02,13068.98 ; R2.2@12879.86,12985.85 ccw(c12856.9,13008.81) 12889.37,13008.81 cw(c12856.9,13008.81) R2.2@12879.86,12985.85 ; R2.2@12889.37,12967.06 cw(c12976.7,12967.06) 12942.02,13047.21 ccw(c12976.7,12967.06) R2.2@12889.37,12967.06 ; 12889.37,13005.77 ccw(c12917.54,13005.77) 12897.62,12985.85 cw(c12917.54,13005.77) 12889.37,13005.77 ; 12889.37,13012.73 cw(c12956.94,13012.73) 12930.11,13074.75 ccw(c12956.94,13012.73) 12889.37,13012.73
NetC2_2: C2.2 P5.1 R1.1 U2.2 | length 1313.8
  Bottom Layer w30: R1.1@12879.86,12864.15 cw(c12858.42,12842.71) 12888.74,12842.71 cw(c12919.06,12842.71) R1.1@12897.62,12864.15 ; 12888.74,12833.06 ccw(c12949.81,12833.06) U2.2@12930.09,12775.26 ; U2.2@12939.78,12803.65 cw(c12964.12,12875) R1.1@12888.74,12875 12888.74,12816.26 ; C2.2@13058.84,12859.94 ccw(c13119.08,12887.04) 13095.65,12825.28 ; P5.1@13201.75,12774.04 ccw(c13169.77,12759.65) 13182.21,12792.44 ccw(c13194.65,12825.23) P5.1@13209.04,12793.25 ; P5.1@13215,12780 C2.2@13020,12853.98 ; P5.1@13215,12785 P5.1@13230,12785 ; 12888.74,12816.26 ccw(c12930,12816.26) U2.2@12930,12775 ; 12888.74,12816.26 U2.2@12930,12775 ; U2.2@12930,12775 C2.2@13001.19,12846.19 ; U2.2@12930,12775 C2.2@13001.18,12846.18 ; C2.2@12981.68,12826.68 ccw(c13033.37,12775) 12960.28,12775 cw(c13033.37,12775) C2.2@12981.68,12826.68 ; C2.2@12981.68,12826.68 cw(c12930,12878.37) 12930,12805.28 ccw(c12930,12878.37) C2.2@12981.68,12826.68 ; C2.2@13001.19,12846.19 cw(c13020,12827.36) C2.2@13020,12853.98 ; C2.2@13001.19,12846.19 13008.98,12853.98 C2.2@13020,12853.98 ; U2.2@12959.31,12804.31 ccw(c12909.64,12853.98) 12979.88,12853.98 cw(c12909.64,12853.98) U2.2@12959.31,12804.31
NetC3_2: C3.2 P12.1 R1.2 R2.1 | length 1396.5
  Bottom Layer w30: R1.2@12801.12,12864.15 cw(c12779.68,12842.71) 12810,12842.71 cw(c12840.32,12842.71) R1.2@12818.88,12864.15 ; R1.2@12801.12,12885.85 ccw(c12779.68,12907.29) 12810,12907.29 ccw(c12840.32,12907.29) R1.2@12818.88,12885.85 ; R2.1@12801.12,12964.15 cw(c12779.68,12942.71) 12810,12942.71 cw(c12840.32,12942.71) R2.1@12818.88,12964.15 ; R2.1@12801.12,12985.85 ccw(c12778.16,13008.81) 12810.63,13008.81 ; R1.2@12810,12863.74 R1.2@12810,12875 ; R2.1@12810,12975 R1.2@12810,12875 ; R2.1@12810.63,12975 12810.63,13091.02 cw(c12910.63,13091.02) 12910.63,13191.02 C3.2@13050,13191.02 ; 12810.63,13005.77 ccw(c12838.8,13005.77) R2.1@12818.88,12985.85 ; C3.2@13014.14,13180.75 ccw(c12989.34,13155.95) 12989.34,13191.02 ccw(c12989.34,13226.1) C3.2@13014.14,13201.3 ; P12.1@13204.73,12669.73 ccw(c13179.93,12644.93) 13179.93,12680 ccw(c13179.93,12715.07) P12.1@13204.73,12690.27 ; P12.1@13215,12680 12910,12680 cw(c12910,12780) 12814.43,12750.57 cw(c12910,12780) 12810,12780 R1.2@12810,12875 ; P12.1@13215,12685 P12.1@13230,12685
NetC100_2: C100.2 C101.2 D100.K D101.K U100.3 | length 954.4
  Bottom Layer w40: C101.2@16740,11218.5 cw(c16740,11171.7) C101.2@16773.1,11204.8 ; D101.K@16871.22,11106.67 cw(c16839.55,11075) D101.K@16884.34,11075 ; D101.K@16884.34,11049.72 cw(c16884.34,10988.7) 16927.49,11031.85 ; U100.3@16935,10925 16935,11024.34 D101.K@16884.34,11075 ; 16935,10982.92 ccw(c16835,10982.92) 16905.71,11053.63 D101.K@16884.34,11075 ; D100.K@16935.66,10805 U100.3@16935.66,10924.34 ; C101.2@16740,11230 cw(c16809.96,11299.96) 16711.02,11299.96 ccw(c16809.96,11299.96) C101.2@16740,11230 ; C101.2@16740,11230 16747.89,11230 16884.34,11093.55 D101.K@16884.34,11075 ; D101.K@16876.8,11093.2 cw(c16858.6,11075) D101.K@16884.34,11075 ; D101.K@16876.8,11093.2 cw(c16858.6,11075) D101.K@16884.34,11075 ; D101.K@16876.8,11093.2 cw(c16858.6,11075) D101.K@16884.34,11075
NetC104_2: C104.2 D102.A R100.2 R102.2 R103.2 U100.1 | length 1082.6
  Bottom Layer w40: U100.1@17135,10925 17135,11074.34 17204.97,11004.37 R102.2@17235,11004.37 ; R100.2@17165,11285.63 17165,11265.4 ccw(c17265,11265.4) 17194.29,11194.69 C104.2@17253.98,11135 17223.27,11104.29 cw(c17152.55,11175) 17152.55,11075 D102.A@17134.34,11075 17183.73,11025.61 ccw(c17235,11076.87) R102.2@17235,11004.37 ; 17172.22,11037.12 ccw(c17233.03,11097.93) R102.2@17233.03,11011.93 ; 17207.09,11181.89 ccw(c17239.87,11214.68) C104.2@17251.57,11169.81 ; R102.2@17253.98,11023.35 R102.2@17235,11004.37 ; C104.2@17256.46,11132.52 ccw(c17260.3,11136.36) C104.2@17261.67,11131.1 ; R103.2@17345,11004.37 R102.2@17235,11004.37 ; D102.A@17134.34,11049.72 cw(c17134.34,10988.7) 17177.49,11031.85 ccw(c17134.34,10988.7) D102.A@17134.34,11049.72